# EAGLE board new_garage (EAGLE 5.11)
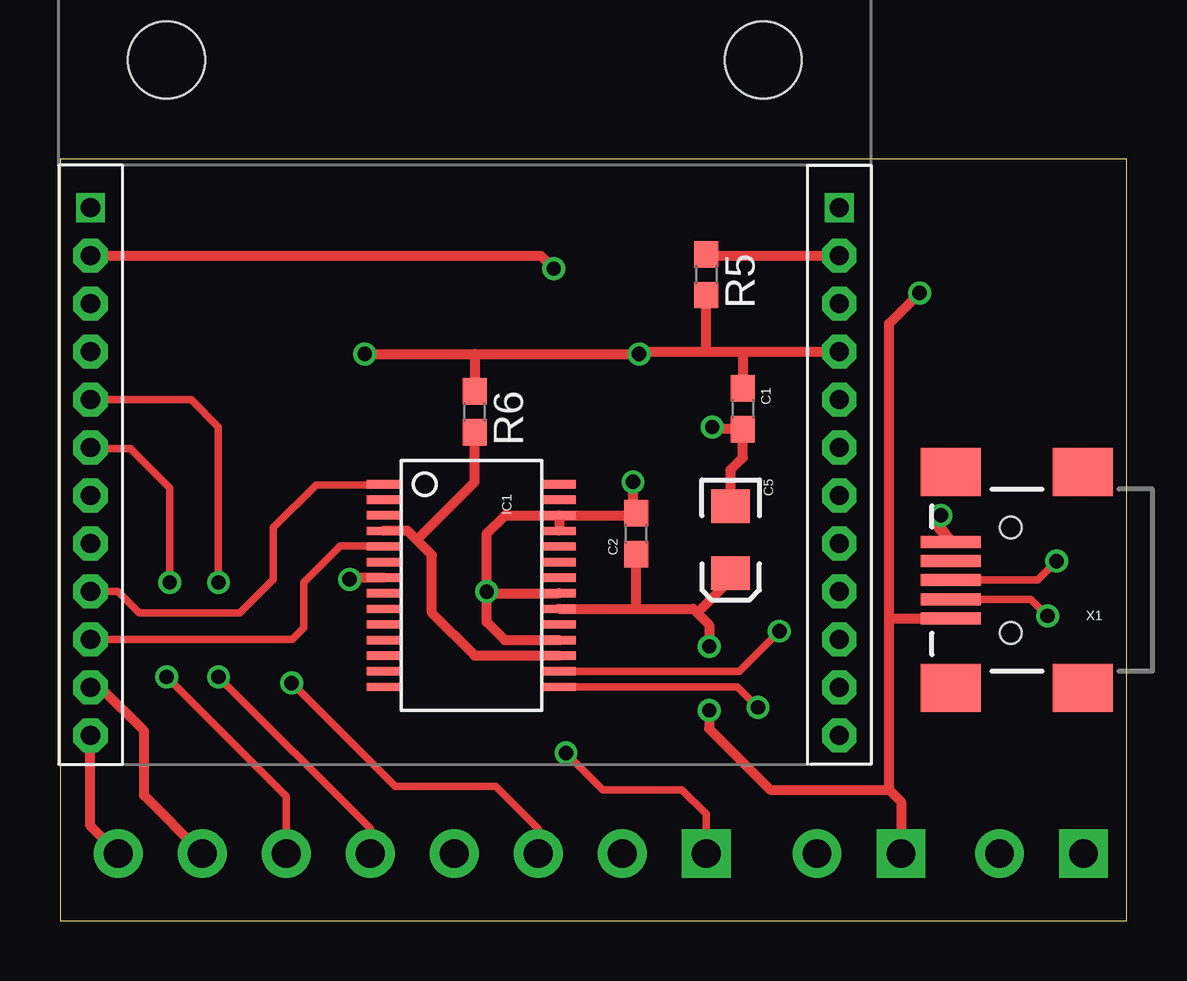
[diagram p0: board, top side]
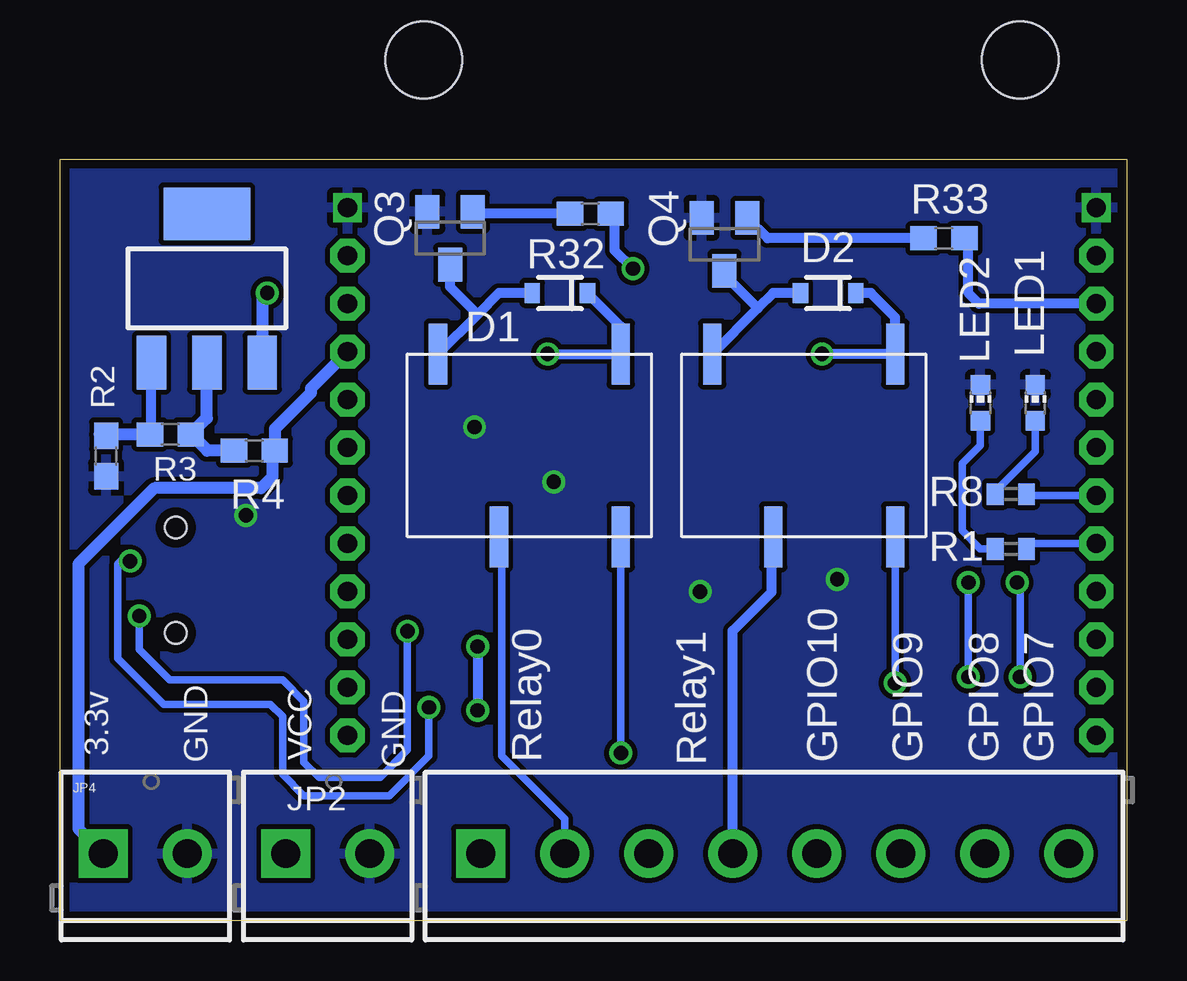
[diagram p1: board, bottom side, seen from below]

Size 44.45 x 31.75 mm. Coordinates in mm from the lower left corner, seen from the top.
Outline: 0,0 44.45,0 44.45,31.75 0,31.75 0,0
Copper layers (1*16): Top 0.0356mm / dielectric 1.5011mm / Bottom 0.0356mm
Design rules "LaenPCBOrder": minimum track width 6mil, minimum drill 13mil, track to track 6mil, track to pad 6mil, pad to pad 6mil, via to via 6mil, smd to smd 6mil, copper to edge 15mil, drill to drill 6mil, minimum pad ring 7mil, minimum via ring 7mil, stop-mask expansion 4mil, vias tented up to drill 0mil, thermal gap 10mil
Net classes: 0 default: width 0.203 mm, drill 0.203 mm, clearance 0.203 mm; 1 Power: width 0.406 mm, drill 0.203 mm, clearance 0.203 mm; 2 GND: width 0.406 mm, drill 0.203 mm, clearance 0.203 mm

## Footprints (pad centres in the part's own frame; a part is rotated, then mirrored left to right if it is on the bottom)
0603 = smd 1.1 x 1: 1 -0.85,0; 2 0.85,0
EIA3216 = smd 1.4 x 1.6: A 1.4,0; C -1.4,0
SOD-323 = smd 0.63 x 0.83: 1 -1.15,0; 2 1.15,0
SSOP28DB = smd 0.348 x 1.397: 1 -4.225,-3.656; 2 -3.575,-3.656; 3 -2.925,-3.656; 4 -2.275,-3.656; 5 -1.625,-3.656; 6 -0.975,-3.656; 7 -0.325,-3.656; 8 0.325,-3.656; 9 0.975,-3.656; 10 1.625,-3.656; 11 2.275,-3.656; 12 2.925,-3.656; 13 3.575,-3.656; 14 4.225,-3.656; 15 4.225,3.656; 16 3.575,3.656; 17 2.925,3.656; 18 2.275,3.656; 19 1.625,3.656; 20 0.975,3.656; 21 0.325,3.656; 22 -0.325,3.656; 23 -0.975,3.656; 24 -1.625,3.656; 25 -2.275,3.656; 26 -2.925,3.656; 27 -3.575,3.656; 28 -4.225,3.656
SCREWTERMINAL-3.5MM-8 = drill 1.2 pad 2.032 square: 1 0,0 | drill 1.2 pad 2.032 round: 2 3.5,0; 3 7,0; 4 10.5,0; 5 14,0; 6 17.5,0; 7 21,0; 8 24.5,0
SCREWTERMINAL-3.5MM-2 = drill 1.2 pad 2.032 square: 1 0,0 | drill 1.2 pad 2.032 round: 2 3.5,0
CHIP-LED0603 = smd 0.8 x 0.8: A 0,-0.75; C 0,0.75
SOT23 = smd 1 x 1.4: 1 -0.95,-1.1; 2 0.95,-1.1; 3 0,1.1
R0402 = smd 0.7 x 0.9: 1 -0.65,0; 2 0.65,0
SOT223 = smd 1.219 x 2.235: 1 -2.311,-3.099; 2 0,-3.099; 3 2.311,-3.099 | smd 3.6 x 2.2: 4 0,3.099
SYNAPSERFENGINE-THM = drill 0.8 square: 1 0,0; 24 31.2,0 | drill 0.8 pad 1.422 octagon: 2 0,-2; 3 0,-4; 4 0,-6; 5 0,-8; 6 0,-10; 7 0,-12; 8 0,-14; 9 0,-16; 10 0,-18; 11 0,-20; 12 0,-22; 13 31.2,-22; 14 31.2,-20; 15 31.2,-18; 16 31.2,-16; 17 31.2,-14; 18 31.2,-12; 19 31.2,-10; 20 31.2,-8; 21 31.2,-6; 22 31.2,-4; 23 31.2,-2 | hole 3.2: 3.17,6.16; 28.03,6.16
G6L-1F = smd 0.762 x 2.54: 2 -2.54,-3.81; 4 2.54,-3.81; 5 2.54,3.81; 8 -5.08,3.81
USB-MINIB = smd 2.5 x 0.5: D+ 2.5,0; D- 2.5,0.8; GND 2.5,-1.6; ID 2.5,-0.8; VBUS 2.5,1.6 | smd 2.5 x 2: MTN1 -3,4.5; MTN2 2.5,4.5; MTN3 -3,-4.5; MTN4 2.5,-4.5 | hole 0.9: 0,2.2; 0,-2.2

## Placement (x,y rotation side)
C1  0.1uF  [0603]  28.45,21.34 270 top
C2  0.1uF  [0603]  24,16.13 90 top
C5  10uF  [EIA3216]  27.94,15.88 270 top
D1  [SOD-323]  23.62,26.16 180 bottom
D2  [SOD-323]  12.45,26.16 180 bottom
IC1  FT232RLSSOP  [SSOP28DB]  17.14,13.97 270 top
JP1  [SCREWTERMINAL-3.5MM-8]  26.92,2.79 0 bottom
JP2  [SCREWTERMINAL-3.5MM-2]  35.04,2.79 0 bottom
JP4  [SCREWTERMINAL-3.5MM-2]  42.65,2.79 0 bottom
LED1  [CHIP-LED0603]  3.81,21.59 0 bottom
LED2  [CHIP-LED0603]  6.1,21.59 0 bottom
Q3  [SOT23]  28.19,28.45 180 bottom
Q4  [SOT23]  16.76,28.19 180 bottom
R1  330  [R0402]  4.83,15.49 0 bottom
R2  2k  [0603]  42.53,19.37 90 bottom
R3  2k  [0603]  39.85,20.27 0 bottom
R4  0  [0603]  36.35,19.59 180 bottom
R5  0  [0603]  26.92,26.92 270 top
R6  0  [0603]  17.27,21.21 270 top
R8  330  [R0402]  4.83,17.78 0 bottom
R32  2k  [0603]  22.35,29.46 180 bottom
R33  2k  [0603]  7.62,28.45 180 bottom
U1  V_REG_317SMD  [SOT223]  38.33,26.36 0 bottom
U$1  RF200THM  [SYNAPSERFENGINE-THM]  1.27,29.72 0 top
U$9  G6L-1P  [G6L-1F]  23.62,19.81 0 bottom
U$10  G6L-1P  [G6L-1F]  12.19,19.81 0 bottom
X1  USBSMD  [USB-MINIB]  39.62,14.19 180 top

## Library data of the parts
C1 C2 C5 D1 D2 IC1 JP1 JP2 JP4 U1 X1 = SparkFun
LED1 LED2 R1 R8 = adafruit
Q3 Q4 R2-R6 R32 R33 = SparkFunEagle-6-6-07
U$1 = Synapse-RFEngine
U$9 U$10 = michael

## Nets
1: JP1.5 U$1.5
2: JP1.6 U$1.6
3: JP1.7 U$1.11
3.3V [Power]: C1.1 D1.1 D2.1 JP4.1 R4.1 R5.2 R6.1 U$1.21 U$9.5 U$10.5
4: JP1.8 U$1.12
5V: C2.1 C5.A IC1.20 JP2.1 U1.3 X1.VBUS
GND [GND]: C1.2 C2.2 C5.C IC1.7 IC1.18 IC1.21 IC1.25 IC1.26 JP2.2 JP4.2 LED1.C LED2.C Q3.2 Q4.2 R2.1 U$1.1 U$1.24 X1.GND
LED0: R8.2 U$1.7
LED1: R1.2 U$1.8
N$1: LED2.A R1.1
N$2: R2.2 R3.1 U1.1
N$3: R3.2 R4.2 U1.2
N$4: R5.1 U$1.23
N$5: IC1.16 X1.D-
N$6: IC1.15 X1.D+
N$7: IC1.4 IC1.17 R6.2
N$10: LED1.A R8.1
N$16: D1.2 Q3.3 U$9.8
N$18: Q3.1 R32.2
N$21: JP1.1 U$9.4
N$22: JP1.2 U$9.2
N$23: JP1.3 U$10.4
N$24: JP1.4 U$10.2
N$25 [GND]: D2.2 Q4.3 U$10.8
N$26: Q4.1 R33.2
OUT1: R32.1 U$1.2
OUT2: R33.1 U$1.3
RXD: IC1.5 U$1.10
TXD: IC1.1 U$1.9

## Tracks (layer width: path | path; a pad name or v marks a point on that pad's centre or on a via)
1  (via drill 0.6)
  Top 0.305: JP1.5 12.92,3.84 v6.6,10.16 | v6.6,14.1 6.6,20.57 5.46,21.72 U$1.5
  Bottom 0.305: v6.6,10.16 v6.6,14.1
2  (via drill 0.6)
  Top 0.305: JP1.6 9.42,5.18 v4.45,10.16 | v4.57,14.1 4.57,18.03 2.92,19.68 1.3,19.68 U$1.6
  Bottom 0.305: v4.45,10.16 4.45,13.97 v4.57,14.1
3
  Top 0.406: U$1.11 1.68,9.72 3.5,7.9 3.5,5.22 JP1.7
3.3V  (via drill 0.6)
  Top 0.406: 27.05,23.72 24.23,23.72 v24.13,23.62 17.27,23.62 | 27.05,23.72 28.57,23.72 | 28.57,23.72 U$1.21 | v12.7,23.62 17.27,23.62 | R5.2 26.92,23.84 27.05,23.72 | 17.27,23.62 R6.1 | C1.1 28.45,23.59 28.57,23.72
  Bottom 0.406: D1.1 21.08,24.77 U$9.5 v24.13,23.62 | v12.7,23.62 U$10.5 9.65,25.15 10.67,26.16 D2.1 | R4.1 35.6,19.49
  Bottom 0.508: R4.1 35.5,20.5 34,22 34,22.19 U$1.21 | 35.6,19.49 35.6,18.5 36.07,18.03 40.51,18.03 43.69,14.86 43.69,3.84 JP4.1
4
  Top 0.406: U$1.12 1.27,3.95 JP1.8
5V  (via drill 0.6)
  Top 0.305: 26.38,12.99 26.54,12.83
  Top 0.406: IC1.20 24,12.99 | 24,12.99 26.38,12.99 | v27.05,11.43 27.05,12.32 26.54,12.83 27.94,14.22 C5.A | v27.05,8.76 27.05,8 29.59,5.46 34.54,5.46 | 24,12.99 C2.1 | JP2.1 35.04,4.96 34.92,5.08 34.54,5.46 | 34.54,5.46 34.54,12.57 | 34.54,12.57 34.54,24.89 v35.81,26.16 | X1.VBUS 34.56,12.59 34.54,12.57
  Bottom 0.406: v27.05,11.43 v27.05,8.76
  Bottom 0.508: U1.3 36.02,25.96 v35.81,26.16
GND  (via drill 0.6)
  Top 0.406: IC1.18 18.53,11.7 17.78,12.45 v17.78,13.72 | IC1.26 18.55,16.89 17.78,16.13 v17.78,13.72 | IC1.21 17.85,13.64 v17.78,13.72 | IC1.7 12.14,14.29 v12.06,14.22 | IC1.26 IC1.25 | C2.2 23.89,16.89 23.89,18.28 v23.88,18.29 | v27.18,20.57 27.27,20.49 C1.2 28.45,19.3 27.94,18.8 C5.C | IC1.26 24,16.89 | 24,16.89 | 24,16.89 23.88,17.02
  Top 0.508: X1.GND 36.62,16.43 v36.7,16.89
  Bottom 0.406: v17.78,13.72 17.78,13.97 | v12.06,14.22 12.06,13.97 | v27.18,20.57 26.92,20.57 | v23.88,18.29 23.88,18.54
  Bottom 0.508: v36.7,16.89 36.7,16.76
  pour Bottom: 0,0.1 0.25,31.5 44.2,31.5 44.2,0.1
LED0
  Bottom 0.305: U$1.7 4.11,17.72 R8.2
LED1
  Bottom 0.305: U$1.8 3.95,15.72 R1.2
N$1
  Bottom 0.305: LED2.A 6.1,19.81 6.86,19.05 6.86,16.26 6.1,15.49 R1.1
N$2
  Bottom 0.406: U1.1 40.64,20.34 R3.1 | R2.2 42.84,20.27
  Bottom 0.508: R3.1 42.47,20.27 R2.2
N$3
  Bottom 0.508: U1.2 38.33,20.95 R3.2 38.32,19.59 R4.2
N$4
  Top 0.406: U$1.23 26.98,27.72 R5.1
N$5  (via drill 0.6)
  Top 0.305: X1.D- 40.46,13.39 v41.15,12.7 | 29.72,12.06 v29.97,12.06 28.3,10.39 IC1.16
  Bottom 0.305: v41.15,12.7 41.15,11.3 39.88,10.03 35.18,10.03 34.29,9.14 34.29,6.6 33.66,5.97 31.11,5.97 29.97,7.11 v29.97,12.06
N$6  (via drill 0.6)
  Top 0.305: X1.D+ 40.73,14.19 v41.53,14.99 | 29.08,9.02 v29.08,8.89 28.23,9.74 IC1.15
  Bottom 0.305: v41.53,14.99 41.91,14.99 42.04,14.86 42.04,10.92 40.13,9.02 35.69,9.02 35.18,8.51 35.18,6.1 34.29,5.21 30.73,5.21 29.08,6.86 v29.08,8.89
N$7
  Top 0.305: IC1.17
  Top 0.406: IC1.4 14.49,16.25 14.86,15.88 | 14.86,15.88 15.49,15.24 15.49,12.83 17.27,11.05 IC1.17 | 14.86,15.88 17.27,18.29 R6.2
N$10
  Bottom 0.305: R8.1 5.48,17.89 3.81,19.56 LED1.A
N$16
  Bottom 0.406: D1.2 26.16,26.16 27.05,25.27 | 27.05,25.27 U$9.8 | Q3.3 28.19,26.42 27.05,25.27
N$18
  Bottom 0.406: R32.2 27.16,29.46 Q3.1
N$21  (via drill 0.6)
  Top 0.305: JP1.1 26.92,4.45 25.91,5.46 22.61,5.46 v21.08,6.99
  Bottom 0.305: v21.08,6.99 U$9.4
N$22
  Bottom 0.305: JP1.2 23.42,4.25 26.04,6.86 26.04,15.88 U$9.2
N$23  (via drill 0.6)
  Top 0.305: JP1.3 19.92,3.83 18.16,5.59 13.97,5.59 v9.65,9.91
  Bottom 0.305: v9.65,9.91 U$10.4
N$24
  Bottom 0.406: JP1.4 16.42,12.08 14.8,13.7 14.8,15.93 U$10.2
N$25
  Bottom 0.406: D2.2 14.73,26.16 15.37,25.53 | 15.37,25.53 U$10.8 | Q4.3 16.76,26.92 15.37,25.53
N$26
  Bottom 0.406: R33.2 14.97,28.45 Q4.1
OUT1  (via drill 0.6)
  Top 0.406: U$1.2 20.03,27.72 v20.57,27.18
  Bottom 0.406: v20.57,27.18 21.34,27.94 21.34,29.3 R32.1
OUT2
  Bottom 0.406: U$1.3 6.16,25.72 6.6,26.16 6.6,28.28 R33.1
RXD
  Top 0.305: U$1.10 9.69,11.72 10.16,12.19 10.16,14.1 11.68,15.62 13.46,15.62 IC1.5
TXD
  Top 0.305: U$1.9 2.41,13.72 3.3,12.83 7.49,12.83 8.89,14.22 8.89,16.38 10.67,18.16 13.46,18.16 IC1.1

## Text on the board
bNames: GND | VCC | GND | 3.3v | GPIO7 | GPIO8 | GPIO9 | GPIO10 | Relay0 | Relay1